# Altium PCB MAIN.PcbDoc (part 2 of 2)
Units mil, origin at the board's own origin, x right, y up, seen from the top; angles counter-clockwise.
Board outline 1220.47 x 826.77 mil, 6 copper layers (Top Layer, Layer 1, Layer 2, Layer 3, Layer 4, Bottom Layer), stack 32.112 mil thick; 100 components, 131 nets, 540 pads, 322 vias.
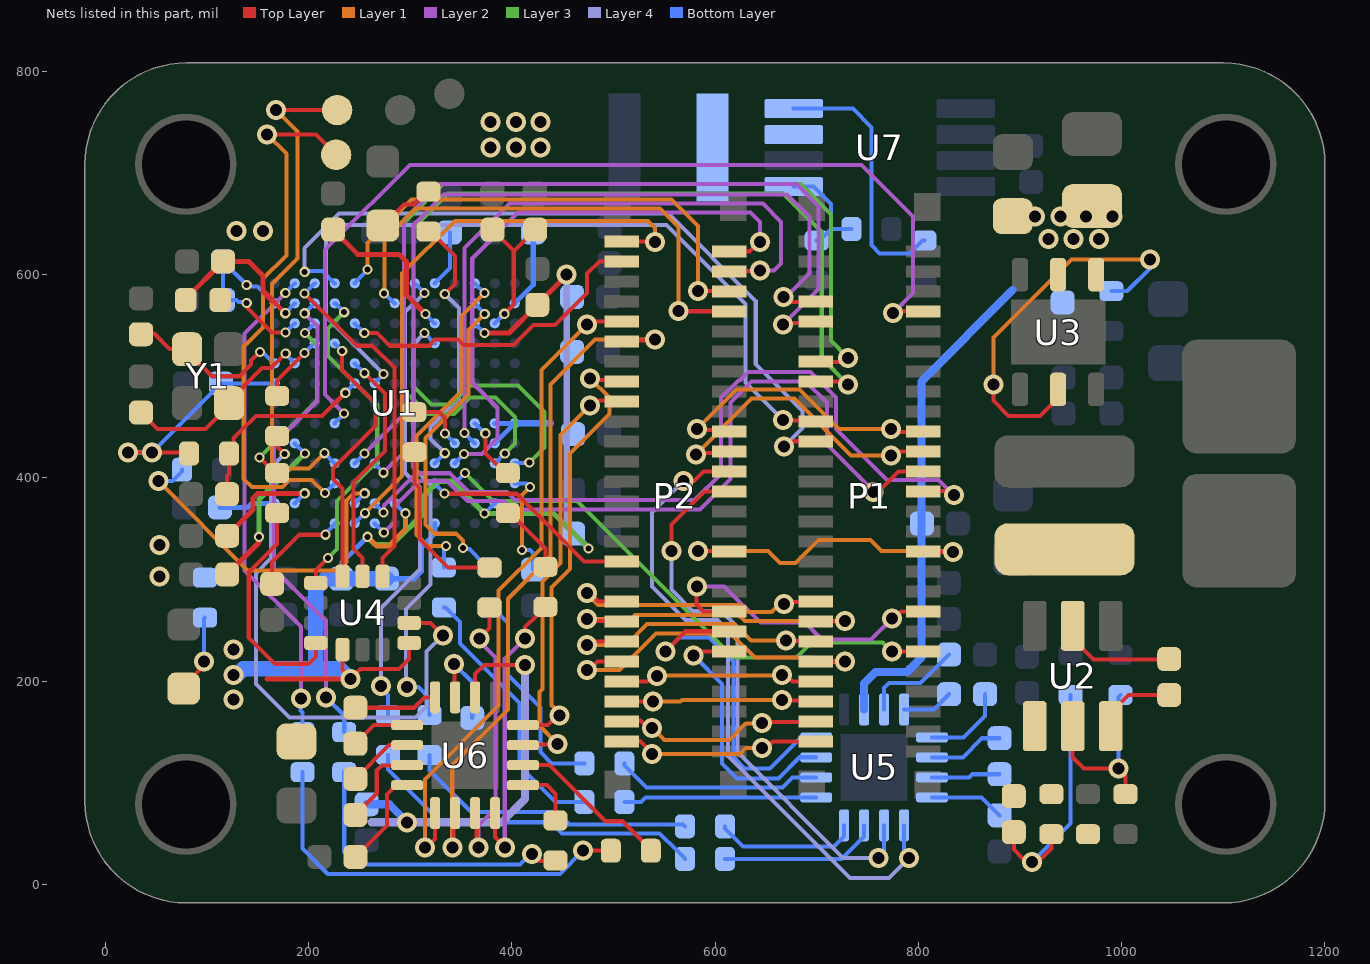
[diagram p6: the nets of this part, all layers, seen from the top]

## Via types
v1: diameter 19.68, hole 11.81, Top Layer to Bottom Layer, tented both sides, 223 vias
v2: diameter 10, hole 5.91, Top Layer to Bottom Layer, tented both sides, 99 vias

## Nets (pads, with @x,y where several pads share a name; then routed paths per layer and width w, separated by ;. In a path a pad name is that pad's centre, name@x,y a point inside that pad or via, vN(x,y) a via of type N, cw(c..) or ccw(c..) an arc to the next point about the centre after c; other vN are vias at no path point) (continued)
I2C2_SDA: P1.45 U1.F4 | length 951.1
  Top Layer w4: v1(775,562) 777,564 804.76,564 P1.45@805,563.76
  Layer 2 w4: v2(234.62,463.3) 216,481.93 216,624.42 221.58,630 299.58,708 744,708 795,657 795,582 v1(775,562)
  Bottom Layer w4: U1.F4@225.63,453.69 225.63,454 234.62,462.99 v2(234.62,463.3)
I2C3_SCL: P2.51 U1.D10 | length 599
  Top Layer w4: P2.51@613.91,622.97 634,623 643,632 v1(644,632)
  Layer 2 w4: v2(353,423.57) 370.57,423.57 386,439 386,468.73 361,493.73 361,616 406,661 635,661 644,652 v1(644,632)
  Bottom Layer w4: U1.D10@343.74,414.32 v2(353,423.57)
I2C3_SDA: P2.49 U1.E11 | length 628.6
  Top Layer w4: P2.49@613.91,603.28 614.26,603.64 643.64,603.64 v1(644,604)
  Layer 2 w4: v2(353.5,444) 353.5,626 397.5,670 647,670 665,652 665,611 658,604 v1(644,604)
  Bottom Layer w4: v2(353.5,444) U1.E11@363.43,434
I2C4_SCL: P2.47 U1.N5 | length 493.4
  Top Layer w4: v1(583,584) 583.2,583.8 613.71,583.8 P2.47@613.91,583.6
  Layer 1 w4: v2(258,605) 258,631 301,674 557,674 583,648 v1(583,584)
  Bottom Layer w4: U1.N5@245.31,591.48 245.31,591.9 258,604.58 v2(258,605)
I2C4_SDA: P2.45 U1.M7 | length 510
  Top Layer w4: v1(564,564) v1(564,564) 613.86,563.96 P2.45@613.91,563.91
  Layer 1 w4: v2(274.24,581.64) 274.5,581.9 274.5,626 274.5,634.5 305,665 546,665 564,647 v1(564,564)
  Bottom Layer w4: v2(274.24,581.64) 274.54,581.64 284.38,571.8 U1.M7@284.68,571.8
IMU1_INT1: R31.2 U1.L3 | length 187.9
  Top Layer w4: v2(151.72,420) 167.03,404.68 R31.2@169,404.68
  Layer 3 w4: v2(151.72,420) 208,476.28 208,530.84 v2(196.34,542.5)
  Bottom Layer w4: v2(196.34,542.5) U1.L3@205.94,552.11
IMU1_INT2_FSYNC: R30.1 U1.K3 | length 67.3
  Top Layer w4: R30.1@169,480.68 169,496 v2(196,523)
  Bottom Layer w4: v2(196,523) 205.43,532.43 U1.K3@205.94,532.43
MCU1_Main_Left_SWCLK: P1.4 P2.4 | length 206.8
  Top Layer w4: P2.4@508,160.36 508.64,161 526.76,161 533.76,154 v1(538,154) ; v1(646,158.79) 646.7,159.49 698.39,159.49 P1.4@699.09,160.2
  Layer 1 w4: v1(538,154) 550,142 614,142 630.16,158.16 645.37,158.16 v1(646,158.79)
MCU1_Main_Left_SWDIO: P1.2 P2.2 | length 201.9
  Top Layer w4: P2.2@508,140.67 508.33,141 526,141 538,129 v1(538,128.32) ; v1(646,134) 650.24,134 656.76,140.51 P1.2@699.09,140.51
  Layer 1 w4: v1(538,128.32) 624.32,128.32 630,134 v1(646,134)
MCU1_Main_Right_SWCLK: P1.12 P2.12 | length 276
  Top Layer w4: v1(474,235.68) 477,238.69 482.69,238.69 483.1,239.1 P2.12@508,239.1 ; v1(670,239.84) 670.45,239.39 698.64,239.39 P1.12@699.09,238.94
  Layer 1 w4: v1(474,235.68) 512.68,235.68 533,256 619,256 635.16,239.84 v1(670,239.84)
MCU1_Main_Right_SWDIO: P1.10 P2.10 | length 347
  Top Layer w4: v1(474,211) 476,211 484.41,219.41 P2.10@508,219.41 ; P1.10@699.09,219.25 699.22,219.13 727.87,219.13 v1(728,219)
  Layer 1 w4: v1(474,211) 506,211 542,247 615.27,247 639.27,223 694,223 698,219 v1(728,219)
MCU2_Main_Left_SWCLK: P1.8 P2.8 | length 196.5
  Top Layer w4: P2.8@508,199.72 533.48,199.72 538.76,205 v1(543,205) ; v1(666,206.16) 669.57,206.16 676.17,199.57 P1.8@699.09,199.57
  Layer 1 w4: v1(543,205) 543.58,205.58 665.42,205.58 v1(666,206.16)
MCU2_Main_Left_SWDIO: P1.6 P2.6 | length 192.4
  Top Layer w4: P2.6@508,180.04 v1(539,180) ; v1(666,181.47) 666.8,180.68 698.3,180.68 P1.6@699.09,179.88
  Layer 1 w4: v1(539,180) 566,180 567.47,181.47 v1(666,181.47)
MCU2_Main_Right_SWCLK: P1.16 P2.16 | length 275.3
  Top Layer w4: v1(474.04,286.89) 476.64,286.89 485.07,278.46 P2.16@508,278.46 ; v1(668,276) 670,278 698.79,278 P1.16@699.09,278.31
  Layer 1 w4: v1(474.04,286.89) 474.04,285.64 484.52,275.16 485.02,275 626,275 633,268 655.76,268 663.76,276 v1(668,276)
MCU2_Main_Right_SWDIO: P1.14 P2.14 | length 322.1
  Top Layer w4: v1(474,261) 476,259 507.78,259 P2.14@508,258.78 ; P1.14@699.09,258.62 699.28,258.81 727.81,258.81 v1(728,259)
  Layer 1 w4: v1(474,261) 517,261 521,265 623.27,265 629.27,259 v1(728,259)
NetC2_2: C2.2 U1.A4 | length 100
  Top Layer w4: C2.2@164,295.72 164,316.97 191.03,344 v2(216.5,344)
  Bottom Layer w4: v2(216.5,344) 216.5,345.07 225.63,354.19 U1.A4@225.63,355.26
NetC3_2: C3.2 U1.C13 | length 110.5
  Layer 1 w4: v2(410,329) 410,383 v2(418,391)
  Bottom Layer w4: U1.C13@402.8,394.63 414.37,394.63 v2(418,391) ; v2(410,329) 418,329 421,326 C3.2@421,309.72
NetC4_2: C4.2 U1.N9 | length 56.3
  Bottom Layer w4: U1.N9@324.06,591.48 339,606.43 C4.2@339,641.57
NetC28_1: C28.1 U2.6 | length 77.9
  Top Layer w4: U2.6@989.4,155.59 989.4,168.58 1007.1,186.28 C28.1@1047,186.28
NetC28_2: C28.2 L1.1 U2.2 | length 116.7
  Top Layer w4: U2.2@952,254.41 952,241.42 972.42,221 1046.28,221 C28.2@1047,221.72
NetC33_1: C33.1 R15.2 R16.1 U2.4
NetC33_2: C33.2 R13.2 R15.1 | length 259
  Top Layer w4: C33.2@894,51.28 894,34 903,25 909,25 v1(912,22) 915,25 921,25 931,35 R15.1@931,49.32
  Bottom Layer w4: v1(912,22) 950,60 R13.2@950,186.32
NetC40_1: C40.1@830.28,226 U5.15 | length 98.8
  Bottom Layer w4: U5.15@766.38,172 766.38,193.38 771,198 802.28,198 C40.1@830.28,226
NetC42_1: C42.1 U5.16 | length 50.4
  Bottom Layer w4: U5.16@786.07,172 815.28,172 C42.1@830.28,187
NetC42_2: C42.2 U5.1 | length 82.2
  Bottom Layer w4: U5.1@813.54,144.54 844.54,144.54 865.72,165.72 C42.2@865.72,187
NetC43_1: C43.1 U5.2 | length 74.3
  Bottom Layer w4: U5.2@813.54,124.85 843.85,124.85 862.72,143.72 C43.1@880,143.72
NetC43_2: C43.2 U5.3 | length 67.8
  Bottom Layer w4: U5.3@813.54,105.15 850.15,105.15 853.28,108.28 C43.2@880,108.28
NetC44_1: C44.1 U5.4 | length 73.8
  Bottom Layer w4: U5.4@813.54,85.46 862.25,85.46 C44.1@880,67.72
NetC45_1: C45.1 U6.15 | length 94.2
  Top Layer w4: v1(343,217) 343.58,216.42 343.58,184.58 U6.15@344.15,184
  Bottom Layer w4: v1(343,217) 361,199 C45.1@361,163.72
NetC47_1: C47.1 U6.16 | length 82.7
  Top Layer w4: C47.1@246,173.72 303.72,173.72 314,184 U6.16@324.46,184
NetC47_2: C47.2 U6.1 | length 58.6
  Top Layer w4: C47.2@246,138.28 264.25,156.54 U6.1@297,156.54
NetC48_1: C48.1 U6.2 | length 64.9
  Top Layer w4: C48.1@246,103.72 279.28,137 296.85,137 U6.2@297,136.85
NetC48_2: C48.2 U6.3 | length 84.5
  Top Layer w4: C48.2@246,68.28 267,89.28 267,111.99 272.01,117 296.85,117 U6.3@297,117.15
NetC49_1: C49.1 U6.4 | length 97.9
  Top Layer w4: C49.1@246,27 277,58 277,88.29 286.17,97.46 U6.4@297,97.46
NetD1_2: D1.2 R10.1 | length 58.9
  Top Layer w4: D1.2@273,648.22 293.78,669 303.35,669 316.03,681.68 R10.1@318,681.68
NetD2_2: D2.2 R18.2 | length 78.5
  Top Layer w4: D2.2@77,192.51 77,195.3 97,215.3 v1(97,219)
  Bottom Layer w4: v1(97,219) 97,261.32 R18.2@98,262.32
NetL2_1: L2.1 U7.7
NetP1_11: P1.11 U1.C10 | length 550.7
  Top Layer w4: v1(774,229) v1(774,229) 804.95,229.05 P1.11@805,229.09
  Layer 3 w4: v2(353.88,404.77) 381.65,377 440,377 464,377 618,223 680,223 695,238 765,238 v1(774,229)
  Bottom Layer w4: U1.C10@343.74,394.63 v2(353.88,404.77)
NetP1_27: P1.27 U1.B6 | length 801
  Top Layer w4: P1.27@805,386.57 805.43,387 826.76,387 830.76,383 v1(835,383)
  Layer 2 w4: v2(273.8,365.94) 274,366.14 274,373 305.5,404.5 339.3,404.5 357.8,386 395,386 403,378 580,378 606,404 606,479 623,496 624.27,496 632.27,504 694,504 719,479 719,448 769,398 820,398 v1(835,383)
  Bottom Layer w4: U1.B6@265,374.94 265,374.85 273.8,366.04 v2(273.8,365.94)
NetP1_29: P1.29 U1.A6 | length 759.5
  Top Layer w4: v1(756,386) 760.24,386 780.5,406.26 P1.29@805,406.26
  Layer 2 w4: v2(273.96,346.26) 284.3,356.61 284.3,371.7 309.61,397 336.19,397 356.19,377 392,377 400,369 585,369 615,399 615,474 636,495 689,495 710,474 710,433 756,387 v1(756,386)
  Bottom Layer w4: U1.A6@265,355.24 v2(273.96,346.26)
NetP1_32: P1.32 U1.N4 | length 754.5
  Top Layer w4: v1(668,431) 672.24,431 677.24,436 698.88,436 P1.32@699.09,435.79
  Layer 4 w4: v2(196.1,602.8) 196,602.9 196,626 230,660 554,660 640,574 640,512 686,466 686,449 v1(668,431)
  Bottom Layer w4: v2(196.1,602.8) 196.78,603.48 213.63,603.48 U1.N4@225.63,591.48
NetP1_34: P1.34 U1.H6 | length 781
  Top Layer w4: v1(667,457) 667.76,456.24 698.33,456.24 P1.34@699.09,455.47
  Layer 4 w4: v2(273.5,502.25) 217,558.75 217,633 233,649 552.27,649 630,571.27 630,494 v1(667,457)
  Bottom Layer w4: U1.H6@265,493.06 265,493.4 273.5,501.9 v2(273.5,502.25)
NetP1_44: P1.44 U1.D5 | length 855.3
  Top Layer w4: v1(667,551) 668.46,552.46 697.64,552.46 P1.44@699.09,553.91
  Layer 2 w4: v2(255,424) 294,463 294,654 329,689 680,689 702,667 702,586 v1(667,551)
  Bottom Layer w4: U1.D5@245.31,414.32 v2(255,424)
NetP1_46: P1.46 U1.D6 | length 806.2
  Top Layer w4: v1(667.16,578) 670,578 675,573 698.5,573 P1.46@699.09,573.6
  Layer 2 w4: v2(273.61,405.03) 303,434.42 303,649 333,679 671,679 693,657 693,601 670,578 v1(667.16,578)
  Bottom Layer w4: U1.D6@265,414.32 265,413.98 273.61,405.37 v2(273.61,405.03)
NetP2_20: P2.20 U1.C9 | length 216
  Top Layer w4: v2(333.71,384.63) 334,384.34 404.66,384.34 437,352 471.16,317.84 P2.20@508,317.84
  Bottom Layer w4: U1.C9@324.06,394.63 324.06,394.46 333.71,384.8 v2(333.71,384.63)
NetP2_50: P2.50 U1.L5 | length 321.9
  Top Layer w4: v2(254.71,542.71) 267.29,542.71 280,530 318.49,530 324.49,536 347,536 352.46,530.54 401.57,530.54 421.3,550.27 442.27,550.27 474,582 474,601 486.13,613.13 P2.50@508,613.13
  Bottom Layer w4: U1.L5@245.31,552.11 v2(254.71,542.71)
NetP2_52: P2.52 U1.A5 | length 584.9
  Top Layer w4: P2.52@508,632.81 508.41,632.41 540.59,632.41 v1(541,632)
  Layer 1 w4: v2(255.27,365.21) 292,401.94 292,601 344,653 534,653 541,646 v1@541,633
  Bottom Layer w4: U1.A5@245.31,355.26 v2(255.27,365.21)
NetR1_2: R1.2 U1.B5 | length 349.3
  Layer 1 w4: v1(52,397) 140,309 229,309 237,317 237,377.6 244.18,384.79 v2(255.16,384.79)
  Bottom Layer w4: v1(52,397) 66,397 75.32,406.32 R1.2@75.32,408 ; U1.B5@245.31,374.94 v2(255.16,384.79)
NetR2_1: R2.1 R23.1 | length 299.1
  Top Layer w4: v1(420,30) 427,23 442.68,23 R23.1@443,23.32
  Bottom Layer w4: R2.1@235,110.32 235,32 247.78,19.22 408.04,19.22 418.82,30 v1(420,30)
NetR3_1: R3.1 R24.1 | length 398.3
  Top Layer w4: v1(470,33) R24.1@497.32,33
  Bottom Layer w4: R3.1@194,110.32 194,35 218.78,10.22 447.22,10.22 v1(470,33)
NetR4_2: R4.2 R21.1 | length 289.4
  Bottom Layer w4: R4.2@319,127.32 319,112 360,71 444.5,71 456.5,59 568.31,59 R21.1@570.32,57
NetR5_2: R5.2 R22.1 | length 343.3
  Bottom Layer w4: R5.2@278,127.32 278,113 330,61 438,61 449.16,49.84 545.47,49.84 562.31,33.01 562.69,33.01 570.32,25.39 R22.1@570.32,25
NetR6_2: R6.2 R19.1 | length 266.2
  Bottom Layer w4: R6.2@333,272.32 334.68,272.32 349,258 349,237.18 407.68,178.5 407.68,116.32 443,81 R19.1@471.32,81
NetR7_2: R7.2 R20.1 | length 212.5
  Bottom Layer w4: R7.2@378,272.32 380.68,272.32 396,257 396,206 428,174 428,130 439,119 R20.1@471.32,119
NetR8_1: R8.1 R25.1 | length 69.4
  Top Layer w4: R8.1@396,365.32 397.97,365.32 433,330.28 R25.1@433,312.37
NetR9_1: R9.1 R26.1 | length 168.1
  Top Layer w4: R9.1@304,425.32 304,395 309,390 309,340 337.32,311.68 R26.1@378,311.68
NetR10_2: R10.2 U1.D9 | length 271.5
  Top Layer w4: R10.2@318,642.32 319.97,642.32 344,618.28 344,591 334.07,581.07 v2(333.93,581.07)
  Layer 4 w4: v2(333.93,581.07) 348,567 348,478 320,450 320,438.26 v2(334,424.26)
  Bottom Layer w4: U1.D9@324.06,414.32 v2(334,424.26)
NetR12_2: R12.2 R14.1 U2.5 | length 181.5
  Top Layer w4: U2.5@952,155.59 952,125 963,114 v1(997,114) 1004,107 R14.1@1004,88.68
  Bottom Layer w4: v1(997,114) 997,184.32 R12.2@999,186.32
NetR17_1: R17.1 U3.5 | length 389.6
  Top Layer w4: v1(874,492) 874,476 889,461 920,461 937.6,478.6 U3.5@937.6,487.01
  Layer 1 w4: v1(874,492) 874,538 951,615 v1(1028,615)
  Bottom Layer w4: R17.1@990,583.68 1005.68,583.68 1028,606 v1(1028,615)
NetR19_2: R19.2 U5.9 | length 190.7
  Bottom Layer w4: R19.2@510.68,81 527,81 531.46,85.46 U5.9@699.54,85.46
NetR20_2: R20.2 U5.10 | length 203.9
  Bottom Layer w4: R20.2@510.68,119 510.68,117.03 532.47,95.24 666.24,95.24 676.15,105.15 U5.10@699.54,105.15
NetR21_2: R21.2 U5.8 | length 141.8
  Bottom Layer w4: R21.2@609.68,57 609.68,55.03 627.72,37 716.83,37 727,47.17 U5.8@727,58
NetR22_2: R22.2 U5.7 | length 157
  Bottom Layer w4: R22.2@609.68,25 724.52,25 746.69,47.17 U5.7@746.69,58
NetR23_2: R23.2 U6.9 | length 61.8
  Top Layer w4: U6.9@411,97.46 434.54,97.46 443,89 R23.2@443,62.68
NetR24_2: R24.2 U6.10 | length 161.3
  Top Layer w4: U6.10@411,117.15 436.85,117.15 492,62 509,62 536.68,34.32 R24.2@536.68,33
NetR25_2: R25.2 U6.8 | length 291.8
  Top Layer w4: U6.8@383.54,70 383.54,46.46 393.32,36.68 v1(393.32,36.06) ; v1(413,242) 413,253 424.99,264.99 424.99,265.38 432.61,273 R25.2@433,273
  Layer 2 w4: v1(393.32,36.06) 393,36.38 393,222 v1(413,242)
NetR26_2: R26.2 U6.7 | length 289.3
  Top Layer w4: U6.7@363.85,70 365.42,68.42 365.42,37.64 v1(367,36.06) ; v1(368,242) 378,252 R26.2@378,272.32
  Layer 2 w4: v1(367,36.06) 367,58 384,75 384,223 368,239 v1(368,242)
NetR30_2: R30.2 U4.9 | length 560
  Top Layer w4: R30.2@169,441.32 169,431 v2(176.42,423.55) ; U4.9@298.96,257.26 319.74,257.26 v1@331.9,245.1
  Layer 4 w4: v2(176.42,423.55) 163,410.14 163,321 148,306 148,197 181,164 305,164 316,175 316,229 v1(332,245)
NetR31_1: R31.1 U4.4 | length 227.1
  Top Layer w4: R31.1@169,365.32 169,335 141,307 141,243 167,217 200,217 207.13,224.13 U4.4@207.13,237.47
NetR37_1: R37.1 U7.8 | length 260.8
  Bottom Layer w4: U7.8@677.35,763.39 735.61,763.39 754,745 754,629 762,621 791.35,621 804.03,633.68 R37.1@806,633.68
NetR38_1: R38.1 R39.2 U7.5 | length 107.3
  Bottom Layer w4: U7.5@677.35,686.61 697.04,686.61 714,669.65 714,645 ; R38.1@700,633.68 702.68,633.68 714,645 ; R39.2@734.32,645 714,645
NetU1_C4: pad.1@227,718 U1.C4 | length 545.8
  Top Layer w4: v1(159,738) 207,738 pad.1@227,718
  Layer 1 w4: v1(159,738) 178,719 178,619 155,596 155,548 136,529 136,399 144,391 174,391 181,398 203,398 v2(216,385)
  Bottom Layer w4: v2(216,385) U1.C4@225.63,394.63
NetU1_D4: pad.1@228,762 U1.D4 | length 500
  Top Layer w4: v1(168,762) pad.1@228,762
  Layer 1 w4: v1(168,762) 189,741 189,616 164,591 164,416 171,409 200.41,409 v2(215.68,424.27)
  Bottom Layer w4: v2(215.68,424.27) U1.D4@225.63,414.32
NRST: C12.2 R11.1 U1.H5 | length 199.3
  Top Layer w4: C12.2@119.72,384 119.72,401.72 121.68,403.68 R11.1@121.68,424 125.97,428.29 125.97,438.97 132,445 148,461 213.26,461 v2(236,483.74)
  Bottom Layer w4: v2(236,483.74) U1.H5@245.31,493.06
PH0: C27.1 U1.J2 Y1.1 | length 195.4
  Top Layer w4: C27.1@35,464.28 51.28,448 98.21,448 121.67,471.46 Y1.1@121.67,473.43 121.67,475.39 154.28,508 163.09,508 v2(177.36,522.27)
  Bottom Layer w4: v2(177.36,522.27) 177.36,521.95 186.26,513.06 U1.J2@186.26,512.74
PH1: C13.1 U1.J1 Y1.3 | length 167.4
  Top Layer w4: C13.1@35,541.28 35.72,542 48,542 63,527 79.91,527 Y1.3@80.33,526.57 80.33,524.61 104.94,500 132,500 143.43,511.43 143.43,515.43 v2(152,524)
  Bottom Layer w4: v2(152,524) 154.61,524 165.87,512.74 U1.J1@166.57,512.74
PWM_1: P1.15 P2.15 | length 308.6
  Top Layer w4: v1(582,293) 581.84,292.84 581.84,275.16 588.38,268.62 P2.15@613.91,268.62 ; v1(774,261.32) 776.44,261.32 783.59,268.46 P1.15@805,268.46
  Layer 2 w4: v1(582,293) 609,293 644.5,257.5 688.5,257.5 705,241 753.68,241 v1(774,261.32)
PWM_2: P1.31 P2.31 | length 305.8
  Top Layer w4: v1(581,423) 582.55,424.55 612.35,424.55 P2.31@613.91,426.1 ; v1(773,422) 777.24,422 781.24,426 804.94,426 P1.31@805,425.94
  Layer 1 w4: v1(581,423) 636,478 678,478 734,422 v1(773,422)
RS232_ENC_Left_RX: P2.13 U5.12 | length 346.7
  Top Layer w4: v1(551,229) 571,249 613.84,249 P2.13@613.91,248.94
  Bottom Layer w4: v1(551,229) 565,243 594,243 618,219 618,125 629,114 654,114 684,144 699,144 U5.12@699.54,144.54
RS232_ENC_Left_TX: P2.11 U5.11 | length 261.6
  Top Layer w4: v1(579,225) 583.24,225 587.24,229 613.65,229 P2.11@613.91,229.25
  Bottom Layer w4: v1(579,225) 607,197 607,119 621.76,104.24 662.24,104.24 683,125 699.38,125 U5.11@699.54,124.85
RS232_ENC_Right_RX: P2.29 U5.5 | length 652.1
  Top Layer w4: v1(569,397) 579.28,397 588.7,406.42 P2.29@613.91,406.42
  Layer 4 w4: v1(569,397) 538,366 538,293 571,260 602.27,260 612.64,249.64 612.64,126.36 733,6 771,6 v1(791,26)
  Bottom Layer w4: U5.5@786.07,58 786.07,30.93 v1(791,26)
RS232_ENC_Right_TX: P2.27 U5.6 | length 554.1
  Top Layer w4: v1(557,328) 557,354 589.73,386.73 P2.27@613.91,386.73
  Layer 4 w4: v1(557,328) 557,290 578,269 606,269 622,253 622,130 726,26 v1(761,26)
  Bottom Layer w4: v1(761,26) 766.38,31.38 U5.6@766.38,58
RS232_RX1: P2.38 U6.12 | length 438.7
  Top Layer w4: U6.12@411,156.54 435.54,156.54 445,166 v1(446.84,166) ; v1(477,498) 478.5,496.5 506.5,496.5 P2.38@508,495
  Layer 1 w4: v1(446.84,166) 446.84,168.34 439,176.19 439,292 457.16,310.16 457.16,424.16 496,463 496,479 v1(477,498)
RS232_RX2: P2.44 U6.5 | length 655.5
  Top Layer w4: v1(314.32,36.06) 316.06,36.06 324.46,44.46 U6.5@324.46,70 ; v1(474,551) 478.24,551 481.32,554.07 P2.44@508,554.07
  Layer 1 w4: v1(314.32,36.06) 314.32,103.32 387,176 387,289 429,331 429,506 v1(474,551)
RS232_TX1: P2.36 U6.11 | length 429
  Top Layer w4: U6.11@411,136.85 411.58,137.42 444.42,137.42 v1(445,138) ; v1(477,471) 481.24,471 486.24,476 507.32,476 P2.36@508,475.32
  Layer 1 w4: v1(445,138) 427,156 427,189 430,192 430,298 448,316 448,442 v1(477,471)
RS232_TX2: P2.42 U6.6 | length 686
  Top Layer w4: v1(341.32,36.06) 342.73,37.48 342.73,68.58 U6.6@344.15,70 ; P2.42@508,534.39 508.81,535.19 540.19,535.19 v1(541,536)
  Layer 1 w4: v1(341.32,36.06) 341.32,117.32 396,172 396,281 438,323 438,492 482,536 v1(541,536)
RX_AI: P1.40 U1.D12 | length 982.1
  Top Layer w4: P1.40@699.09,514.53 699.62,514 722.76,514 726.76,518 v1(731,518)
  Layer 3 w4: v2(393,424) 403,434 403,460 384,479 359,479 343,463 317,463 294,486 294,651 332,689 684,689 714,659 714,535 v1(731,518)
  Bottom Layer w4: U1.D12@383.11,414.32 383.21,414.32 392.9,424 v2(393,424)
SBUS_1: P1.21 P2.21 | length 330.7
  Top Layer w4: v1(583,328) 583.16,327.84 613.74,327.84 P2.21@613.91,327.68 ; P1.21@805,327.52 805.26,327.26 833.74,327.26 v1(834,327)
  Layer 1 w4: v1(583,328) 652,328 664,316 679,316 702,339 753,339 764,328 767,328 767.16,327.84 833.16,327.84 v1(834,327)
SBUS_2: P1.33 P2.33 | length 289.6
  Top Layer w4: v1(582,448) 583.11,446.89 612.8,446.89 P2.33@613.91,445.79 ; v1(773,448) 776,445 804.37,445 P1.33@805,445.63
  Layer 1 w4: v1(582,448) 621,487 683,487 722,448 v1(773,448)
SPI1_CS: U1.N3 U4.12 | length 343.1
  Top Layer w4: v2(196,581.54) 247.54,530 263,530 284.46,508.54 284.46,332.77 272.68,321 U4.12@272.68,303.02
  Bottom Layer w4: v2(196,581.54) U1.N3@205.94,591.48
SPI1_MISO: U1.M4 U4.1 | length 331.2
  Top Layer w4: U4.1@207.13,296.53 207.13,309.13 v2(219,321)
  Layer 3 w4: v2(219,321) 228,330 228,377 267.5,416.5 267.5,471.5 219,520 219,547 v2(235,563)
  Bottom Layer w4: U1.M4@225.63,571.8 226.2,571.8 v2(235,563)
SPI1_MOSI: U1.K4 U4.14 | length 267.4
  Top Layer w4: v2(233,525) 233,506 266,473 266,451 224,409 224,399 233.32,389.68 233.32,321 U4.14@233.32,303.02
  Bottom Layer w4: U1.K4@225.63,532.43 U1.K4@225.63,532.43 v2(233,525)
SPI1_SCK: U1.J5 U4.13 | length 238.6
  Top Layer w4: U4.13@253,303.02 253,321 244,330 244,395.42 275,426.42 275,483.06 v2(255.05,503.01)
  Bottom Layer w4: U1.J5@245.31,512.74 v2(255.05,503.01)
TX_AI: P1.38 U1.D13 | length 1007.6
  Top Layer w4: P1.38@699.09,494.84 699.25,495 728,495 v1(731,492)
  Layer 3 w4: v2(417.17,415.17) 432,430 432,465 406,491 359,491 340,472 321,472 303,490 303,646 337,680 667,680 705,642 705,518 v1(731,492)
  Bottom Layer w4: U1.D13@402.8,414.32 403.22,414.74 416.74,414.74 v2(417.17,415.17)
USART1_RX: R7.1 U1.M11 | length 330.7
  Layer 1 w4: v2(352,331) 351.79,331.21 351.79,338.35 345.14,345 324,345 315,354 315,439.39 357.5,481.89 357.5,545.58 v2(373.27,561.35)
  Bottom Layer w4: v2(352,331) 353.15,329.85 358.15,329.85 371.76,316.24 376.31,311.68 R7.1@378,311.68 ; U1.M11@363.43,571.8 363.43,571.49 373.27,561.65 v2(373.27,561.35)
USART1_TX: R6.1 U1.N11 | length 334.9
  Layer 1 w4: v2(335,333) 317,333 306,344 306,441 350,485 350,558.91 v2(373,581.91)
  Bottom Layer w4: R6.1@333,311.68 333,331 v2(335,333) ; U1.N11@363.43,591.48 v2(373,581.91)
USART2_RX: R3.2 U1.N2 | length 486.1
  Layer 2 w4: v2(177,582) 137,542 137,309 192.34,253.66 v1(192.34,182.83)
  Bottom Layer w4: v2(177,582) 177,582.11 186.26,591.37 U1.N2@186.26,591.48 ; v1(192.34,182.83) 192,182.48 192,171 194,169 R3.2@194,149.68
USART2_TX: R2.2 U1.M3 | length 477.6
  Layer 2 w4: v2(196.1,561.95) 208.5,549.55 208.5,475.5 165.92,432.92 165.92,321 165.92,310.08 217,259 v1(217,184)
  Bottom Layer w4: v2(196.1,561.95) U1.M3@205.94,571.8 ; v1(217,184) 235,166 R2.2@235,149.68
USART3_RX: R5.1 U1.N8 | length 461.6
  Layer 4 w4: v1(271,195) 271,272 309.45,310.45 309.45,321 309.45,390.55 295,405 295,563 v2(314,582)
  Bottom Layer w4: v1(271,195) 271,193 278,186 R5.1@278,166.68 ; U1.N8@304.37,591.48 304.52,591.48 v2(314,582)
USART3_TX: R4.1 U1.K9 | length 427.5
  Layer 4 w4: v1(297,194) 296,195 296,271 320,295 320,316.24 320,393 303,410 303,531.48 v2(314,542.48)
  Bottom Layer w4: v1(297,194) 308,194 319,183 R4.1@319,166.68 ; v2(314,542.48) U1.K9@324.06,532.43
USART6_RX: R9.2 U1.E10 | length 61.4
  Top Layer w4: R9.2@304,464.68 328.32,464.68 334.23,458.77 v2(334.23,443.77)
  Bottom Layer w4: v2(334.23,443.77) 334.23,443.64 343.74,434.13 U1.E10@343.74,434
USART6_TX: R8.2 U1.F11 | length 64.4
  Top Layer w4: v2(373.86,443.85) 373.86,424.14 393.32,404.68 R8.2@396,404.68
  Bottom Layer w4: U1.F11@363.43,453.69 363.73,453.69 373.56,443.85 v2(373.86,443.85)
VCAP_DSI: C5.2 C6.2 U1.L12 | length 137.8
  Top Layer w4: C6.2@381,644.28 381,644 401.86,623.14 ; v2@393,562 401.86,570.86 401.86,623.14 ; C5.2@423,644.28 401.86,623.14
  Bottom Layer w4: U1.L12@383.11,552.11 v2(392.5,561.5)
VDD: C1.2 C8.2 C9.2 C10.2 C11.2 C16.2 C17.2 C18.2 C19.2 C20.2 C21.2 C22.2 C25.2 C26.2 C36.1 C37.1 C38.1@893,657.5 C39.1@971,667.57 C41.1 C46.1 FB1.2 R11.2 R18.1 U1.A9 U1.B1 U1.B2 U1.B7 U1.B12 U1.E2 U1.E12 U1.F12 U1.F13 U1.H1 U1.L9 U1.L11 U1.M2 U1.M13 U3.1 U3.2 U4.5 U4.8 U5.14 U6.14 | length 3357.9
  Top Layer w4: v1(22,425) v1(45.72,425) 81.31,425 R11.2@82.32,424 ; U4.5@233.32,230.98 233.32,210.68 241,203 v1(241,202) 251,212 289,212 298.87,221.87 U4.8@298.87,237.47 ; U6.14@363.85,184 363.85,206.85 373,216 v1(413,216)
  Top Layer w5: FB1.2@78.99,575 78.99,576.23 C16.2@115.72,613 ; C16.2@115.72,613 141,613 155,599 155,584 v2(177,562) ; C17.2@119.72,305 151,336.28 v2(151,341.99) ; C46.1@119.72,343 145,368.28 145,380 149.79,384.79 v2(196.1,384.79) ; 159,202 v1(241,202) ; C8.2@224,644.28 248.28,620 289,620 296,613 296,580.17 v2(315,561.17) ; v2(373,542.54) 397.25,542.54 C25.2@425,570.28 425,570.64 454,599.64 v1(454,600)
  Layer 3 w5: v2(151,341.99) 151,378.74 v2(196.26,424) ; v2(258,342) 258,341.6 265.34,334.26 282.26,334.26 314,366 314,383 327.63,396.63 341.37,396.63 v2(373,365) 441.15,365 v2(475.56,330.59)
  Layer 1 w5: v2(258,342) 267,333 279,333 295.13,349.13 v2(295.13,365.1)
  Layer 4 w6: v1(454,600) 454,352.15 v2(475.56,330.59)
  Layer 4 w8: 262,61 v1(297,61) 390,61 413,84 v1(413,216)
  Bottom Layer w4: v1(22,425) v1(45.72,425) C11.2@113.72,493 113.77,493.06 U1.H1@166.57,493.06 ; v2(177,562) 177,562.27 186.26,571.53 U1.M2@186.26,571.8 ; U1.B2@186.26,374.94 v2(196.1,384.79) ; U1.E2@186.26,434 v2(196.26,424) ; U1.B7@284.68,374.94 284.99,374.94 294.83,365.1 v2(295.13,365.1) ; v2(315,561.17) U1.L9@324.06,552.11 ; U1.L11@363.43,552.11 v2(373,542.54) ; v2(373,365) 373.08,365 383.03,374.94 U1.B12@383.11,374.94 U1.B12@383.11,374.71 ; C21.2@460.28,345 460.72,345 475.13,330.59 v2(475.56,330.59)
  Bottom Layer w5: C36.1@112.72,371 140,371 143.94,374.94 U1.B1@166.57,374.94 ; C22.2@232,300.72 233,301.72 233,317 v2(258,342) ; C1.2@277,300.72 303.72,300.72 310.99,307.99 310.99,331.99 324.06,345.06 U1.A9@324.06,355.26 ; U1.E12@383.11,434 U1.F13@402.8,453.69 U1.F12@383.11,453.69 ; U1.M13@402.8,571.8 421,590 C10.2@421,641.57
  Bottom Layer w6: U1.F13@402.8,453.69 438.69,453.69
  Bottom Layer w8: C19.2@257,78.72 279.28,78.72 v1(297,61) ; U5.14@746.69,172 746.69,197.69 758,209 789,209 803,223 803,495 892.79,584.79
  Bottom Layer w15: v1(126,206) 129.7,206 135.7,212 230.64,212 240.64,202 v1(241,202) ; 207,213 207,290.93 216.79,300.72 C22.2@232,300.72 C1.2@277,300.72
  other v1: 126,182 126,231 53,303 53,334 928,635 953,635 978,635 129,643 155,643 915,657 940,657 965,657 991,657 379,725 404,725 428,725 379,750 404,750 428,750
VDDA: C14.2 C15.2 FB1.1 U1.L2 U1.M1 | length 195.8
  Top Layer w4: v2(139,572) 140.15,570.85 140.15,566.85 164,543 v2(177.15,543)
  Bottom Layer w4: v2(139,572) 137.85,573.15 130.85,573.15 129,575 C14.2@115.72,575 C15.2@115.72,613 v2(139.04,589.68) 140.19,588.53 149.84,588.53 U1.M1@166.57,571.8 ; v2(177.15,543) U1.L2@186.26,552.11
pads on no net: P1.0 P1.13 P1.50 P1.52 P2.0 P2.22 P2.32 P2.34 P2.46 U1.A2 U1.A8 U1.A10 U1.A13 U1.B8 U1.B10 U1.C1 U1.C2 U1.C3 U1.C6 U1.C7 U1.C8 U1.C11 U1.D2 U1.D3 U1.D7 U1.D8 U1.D11 U1.E1 U1.E3 U1.E4 U1.E6 U1.E7 U1.E8 U1.E9 U1.F6 U1.F7 U1.F8 U1.F9 U1.F10 U1.G1 U1.G2 U1.G3 U1.G4 U1.G5 U1.G6 U1.G7 U1.G8 U1.G9 U1.G10 U1.G11 U1.H3 U1.H4 U1.H7 U1.H10 U1.H12 U1.H13 U1.J3 U1.J4 U1.J6 U1.J7 U1.J8 U1.J12 U1.J13 U1.K1 U1.K2 U1.K5 U1.K6 U1.K7 U1.K8 U1.K10 U1.K12 U1.K13 U1.L4 U1.L6 U1.L7 U1.L8 U1.L10 U1.M5 U1.M8 U1.M10 U1.M12 U1.N12 U1.N13 U3.4

## Polygon pours and split planes (outlines as drawn)
GND on Top Layer "GND_L01_P043" (solid, remove dead copper, pour order 43): -20.24,81.61 -20.24,708.39 cw(c79.76,708.39) 79.76,808.39 1100.24,808.39 cw(c1100.24,708.39) 1200.24,708.39 1200.24,81.61 cw(c1100.24,81.61) 1100.24,-18.39 79.76,-18.39 cw(c79.76,81.61)
VDD on Top Layer "VDD_L01_P015" (solid, remove dead copper, pour order 15): 1003,690 1003,635 984,616 984,586 981,583 931,583 929,585 929,616 909,636 878,636 868,646 868,690
+5V_SYS on Top Layer "NONET_L-01_P-001" (solid, remove dead copper, pour order 35): 314,805.5 314,746.5 363,746.5 363,805.5
+5V_SYS on Top Layer "NONET_L-01_P-001" (solid, remove dead copper, pour order 31): 873.5,765.04 880.5,772.04 927.96,772.04 935,765 935,751 928.04,744.04 880.5,744.04 873.5,751.04
GND on Top Layer "GND_L01_P022" (solid, remove dead copper, pour order 22): 975,230 975,282 1099,282 1104,277 1104,251 1096,243 1004,243 1001,240 1001,230
12V on Top Layer "12V_L01_P021" (solid, remove dead copper, pour order 21): 1073,235 1099,235 1112,248 1112,281 1105,288 1045,288 1045,409 1176,409 1176,222 1073,222
VDDA on Top Layer "VDDA_L01_P018" (solid, remove dead copper, pour order 18): 145,595 145,562 106,562 101,567 101,583 113,595
NetC33_1 on Top Layer "NETC33_1_L01_P017" (solid, remove dead copper, pour order 17): 902,181 902,123 881,102 881,74 937,74 953,58 953,41 956,38 978,38 981,41 981,57 974,64 961,64 945,80 945,105 927,123 927,181
VDD on Top Layer "VDD_L01_P011" (solid, remove dead copper, pour order 11): 68,587 84,587 103,606 103,637 123,657 236,657 236,632.28 236.14,632.14 236,632 141,632 128,619 128,601 110,601 90,581 90,563 68,563
VDD on Top Layer "VDD_L01_P012" (solid, remove dead copper, pour order 12): 115,352 126,352 126,287 133,280 133,241 170,204 170,174 181,163 208,163 212,159 212,126 206,120 170,120 115,175
VCAP_DSI on Top Layer "VCAP_DSI_L01_P009" (solid, remove dead copper, pour order 9): 368,657 435,657 435,635 427,627 405.72,627 401.86,623.14 398,627 375,627 368,634
12V on Top Layer "NONET_L-01_P-001" (solid, remove dead copper, pour order 4): 928,229 928,280 916,292 856,292 856,238 865,229
+5V_SYS on Top Layer "NONET_L-01_P-001" (solid, remove dead copper, pour order 1): 874,451 874,373 1032,373 1032,412 1052,432 1052,534 997,534 997,512 992,507 964,507 964,472 943,451
NetC28_2 on Top Layer "NONET_L-01_P-001" (solid, remove dead copper, pour order 0): 940,229 940,281 921,300 874,300 874,364 1032,364 1032,300 983,300 964,281 964,229
GND on Bottom Layer "GND_L06_P041" (solid, remove dead copper, pour order 41): -20.24,81.61 -20.24,708.39 cw(c79.76,708.39) 79.76,808.39 1100.24,808.39 cw(c1100.24,708.39) 1200.24,708.39 1200.24,81.61 cw(c1100.24,81.61) 1100.24,-18.39 79.76,-18.39 cw(c79.76,81.61)
+5V_SYS on Bottom Layer "+5V_SYS_L06_P052" (solid, pour order 52): 891,769 884,762 884,753 878,747 817,747 817,702.46 884.46,702.46 897,715 922,715 932,725 932,763 926,769
NetL2_1 on Bottom Layer "NETL2_1_L06_P050" (solid, pour order 50): 580,790 603.58,790 643.79,747.3 707,747.3 707,728.2 644.2,728.2 615,699 615,670 580,670
1V8 on Bottom Layer "1V8_L06_P049" (solid, pour order 49): 509,633 509,663.4 530,671.8 530,780 508,802 253,802 221,770 221,616 235.65,601.35 243.13,601.35 247,605.22 247,617 257,627 268,627 274,633 274,741 300,767 451,767 484,734 484,633
VDD on Bottom Layer "VDD_L06_P019" (solid, remove dead copper, pour order 19): 436.5,635.5 440,632 440,466 430,456 430,451 449,432 468,432 472,436 472,455 462,465 462,503 471,512 471,536 471,633 471,670
VDD on Bottom Layer "NONET_L-01_P-001" (solid, pour order 37): 375,761 369,755 369,719 375,713 418,713 439,692 439,665 426,652 412,652 412,631 435.5,631 471,666.5 471,723 456,738 433,761
VDD on Bottom Layer "NONET_L-01_P-001" (solid, remove dead copper, pour order 7): 866,557 866,643 889,670 1008,670 1008,611 998,601 969,601 960,592 960,566 951,557 914,557
12V on Bottom Layer "NONET_L-01_P-001" (solid, remove dead copper, pour order 34): 879,343 870,334 870,302 845,277 822,277 816,271 816,251 823,244 885,244 916,275 916,337 910,343
12V on Bottom Layer "NONET_L-01_P-001" (solid, remove dead copper, pour order 32): 1173,409 1068,409 1068,328 1173,328
VDD on Bottom Layer "VDD_L06_P020" (solid, remove dead copper, pour order 20): 106,291 115,282 115,175 119,171 135,171 140,176 140,198 154,212 140,226 140,291
VDD on Bottom Layer "VDD_L06_P013" (solid, remove dead copper, pour order 13): 100,380 100,349 95,344 47,344 43,340 43,298 54,287 140,287 140,319 125,334 125,380 121,384 104,384
+5V_SYS on Bottom Layer "NONET_L-01_P-001" (solid, remove dead copper, pour order 2): 977,557 977,528 982,523 1001,523 1008,516 1008,488 998,478 929,478 929,278 894,243 894,212 963,212 963,382 1030,449 1070,489 1070,528 1064,534 1020,534 1009,545 1009,557
GND on Layer 3 "GND_L04_P047" (solid, remove dead copper, pour order 47): -20.24,81.61 -20.24,708.39 cw(c79.76,708.39) 79.76,808.39 1100.24,808.39 cw(c1100.24,708.39) 1200.24,708.39 1200.24,81.61 cw(c1100.24,81.61) 1100.24,-18.39 79.76,-18.39 cw(c79.76,81.61)
12V on Layer 3 "NONET_L-01_P-001" (solid, pour order 3): 1173,413 950,413 856,319 856,237 894,237 946,289 1173,289
GND on Layer 4 "GND_L05_P048" (solid, remove dead copper, pour order 48): -20.24,81.61 -20.24,708.39 cw(c79.76,708.39) 79.76,808.39 1100.24,808.39 cw(c1100.24,708.39) 1200.24,708.39 1200.24,81.61 cw(c1100.24,81.61) 1100.24,-18.39 79.76,-18.39 cw(c79.76,81.61)
1V8 on Layer 4 "1V8_L05_P040" (solid, pour order 40): 247,630.06 247,601 246,600 226,600 225,601 225,625 230.06,630.06
VDD on Layer 4 "VDD_L05_P010" (solid, remove dead copper, pour order 10): 979,727 898,727 846,779 227,779 9,561 9,229 181,57 273,57 273,62 140,195 140,313 132,321 132,583 252,703 811,703 878,636 909,636 929,616 929,585 931,583 981,583 984,586 984,616 1003,635 1003,703
GND on Layer 2 "GND_L03_P046" (solid, remove dead copper, pour order 46): -20.24,81.61 -20.24,708.39 cw(c79.76,708.39) 79.76,808.39 1100.24,808.39 cw(c1100.24,708.39) 1200.24,708.39 1200.24,81.61 cw(c1100.24,81.61) 1100.24,-18.39 79.76,-18.39 cw(c79.76,81.61)
+5V_SYS on Layer 2 "NONET_L-01_P-001" (solid, remove dead copper, pour order 30): 929,740 872,740 869,743 869,773 872,776 929,776 939,766 939,750
+5V_SYS on Layer 2 "NONET_L-01_P-001" (solid, remove dead copper, pour order 29): 977,451 1053,527 1067,527 1071,523 1071,490 987,406 942,406 933,415 933,439 945,451
GND on Layer 1 "GND_L02_P045" (solid, remove dead copper, pour order 45): -20.24,81.61 -20.24,708.39 cw(c79.76,708.39) 79.76,808.39 1100.24,808.39 cw(c1100.24,708.39) 1200.24,708.39 1200.24,81.61 cw(c1100.24,81.61) 1100.24,-18.39 79.76,-18.39 cw(c79.76,81.61)

## Keep-outs
Keep-Out Layer:
  the board outline again, w5

## Silkscreen, mask and mechanical layers (free items; w line width, h text height)
Top Overlay:
  text "RX8" at 161,759.35 h30
  text "5V" at 385.65,745 h30 r90
  text "C MAIN  / TO ROLL" at 464,721 h50
  text "C MAIN  / TO YAW" at 667,721 h50
  text "TX8" at 162,707.35 h30
  text "GND" at 321.65,700 h30 r90
  text "GND" at 1054.46,431 h50 r90
  text "12V" at 1053,310 h50 r90
Mechanical 1:
  circle w0.5: c1102.75,78.72 r43.31
  circle w0.5: c79.13,78.72 r43.31
  circle w0.5: c1102.75,708.64 r43.31
  circle w0.5: c79.13,708.64 r43.31
  lines w0.5: 2848.54,-997.86 ccw(c2850.37,-997.59) 2850,-999.4 ccw(c2851.84,-993.27) 2851.11,-999.63 ccw(c2852.95,-984.26) 2852.24,-999.73 ccw(c2853.49,-968.34) 2853.37,-999.75 ; 3187.66,-545.49 ccw(c3187.15,-540.53) 3188.52,-545.32 ccw(c3187.78,-542.47) 3190,-544.4 ccw(c3188.12,-542.83) 3190.57,-542.77